# EAGLE board mehhhh (EAGLE 6.1)
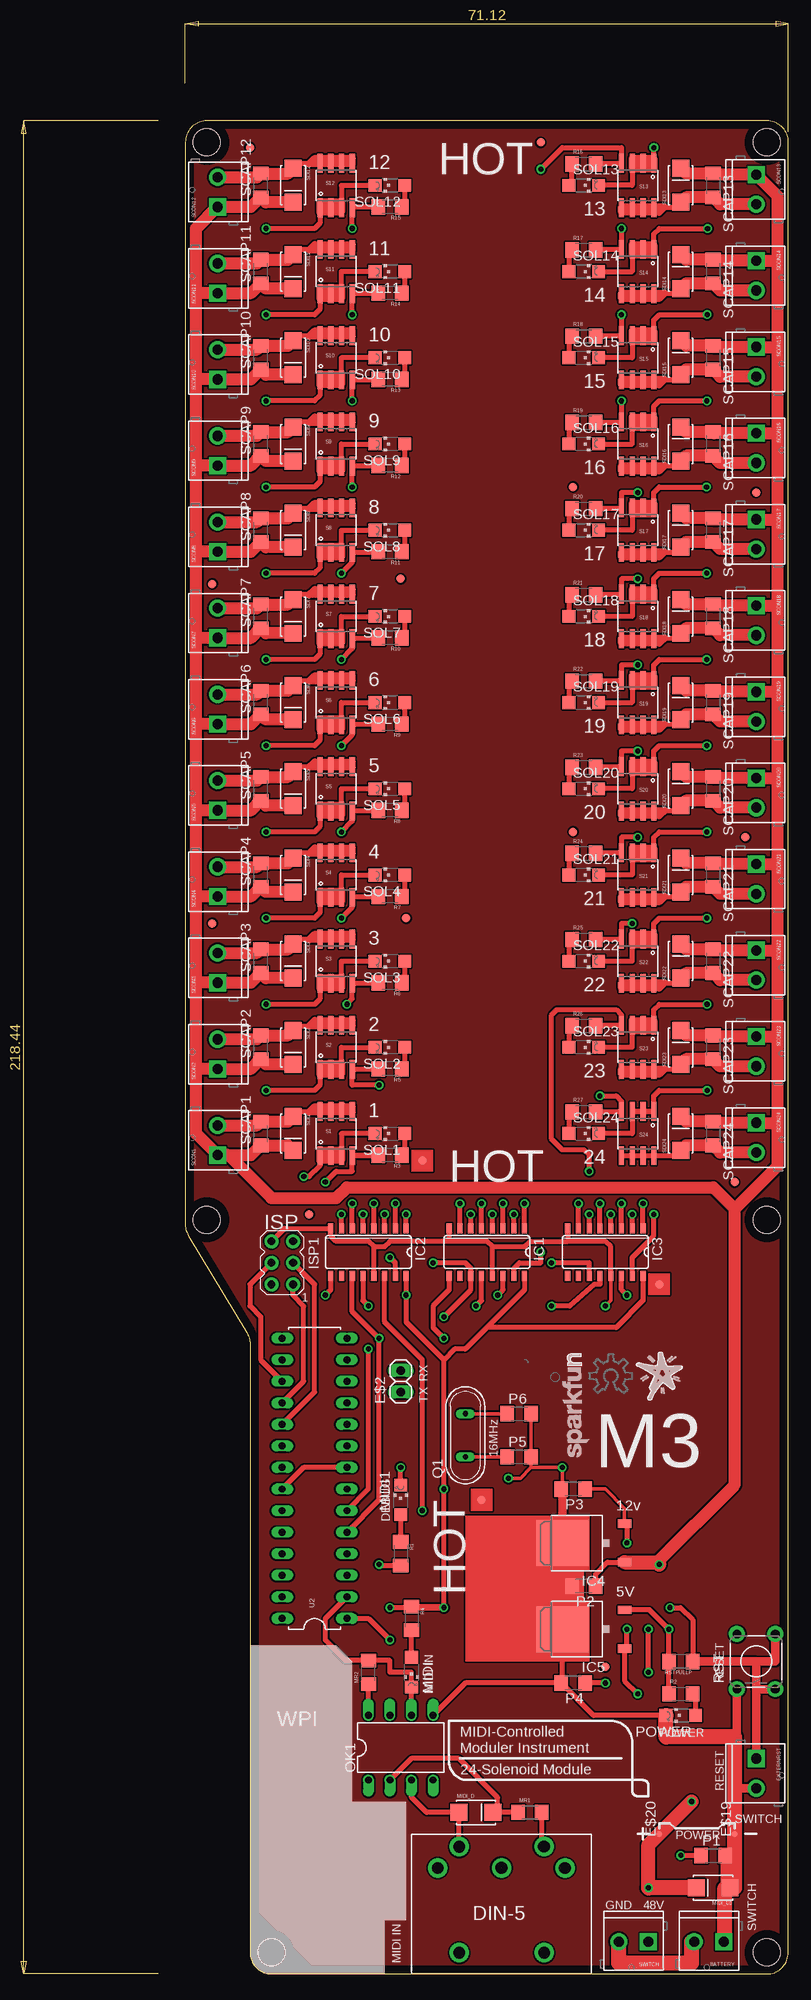
[diagram p0: board, top side]
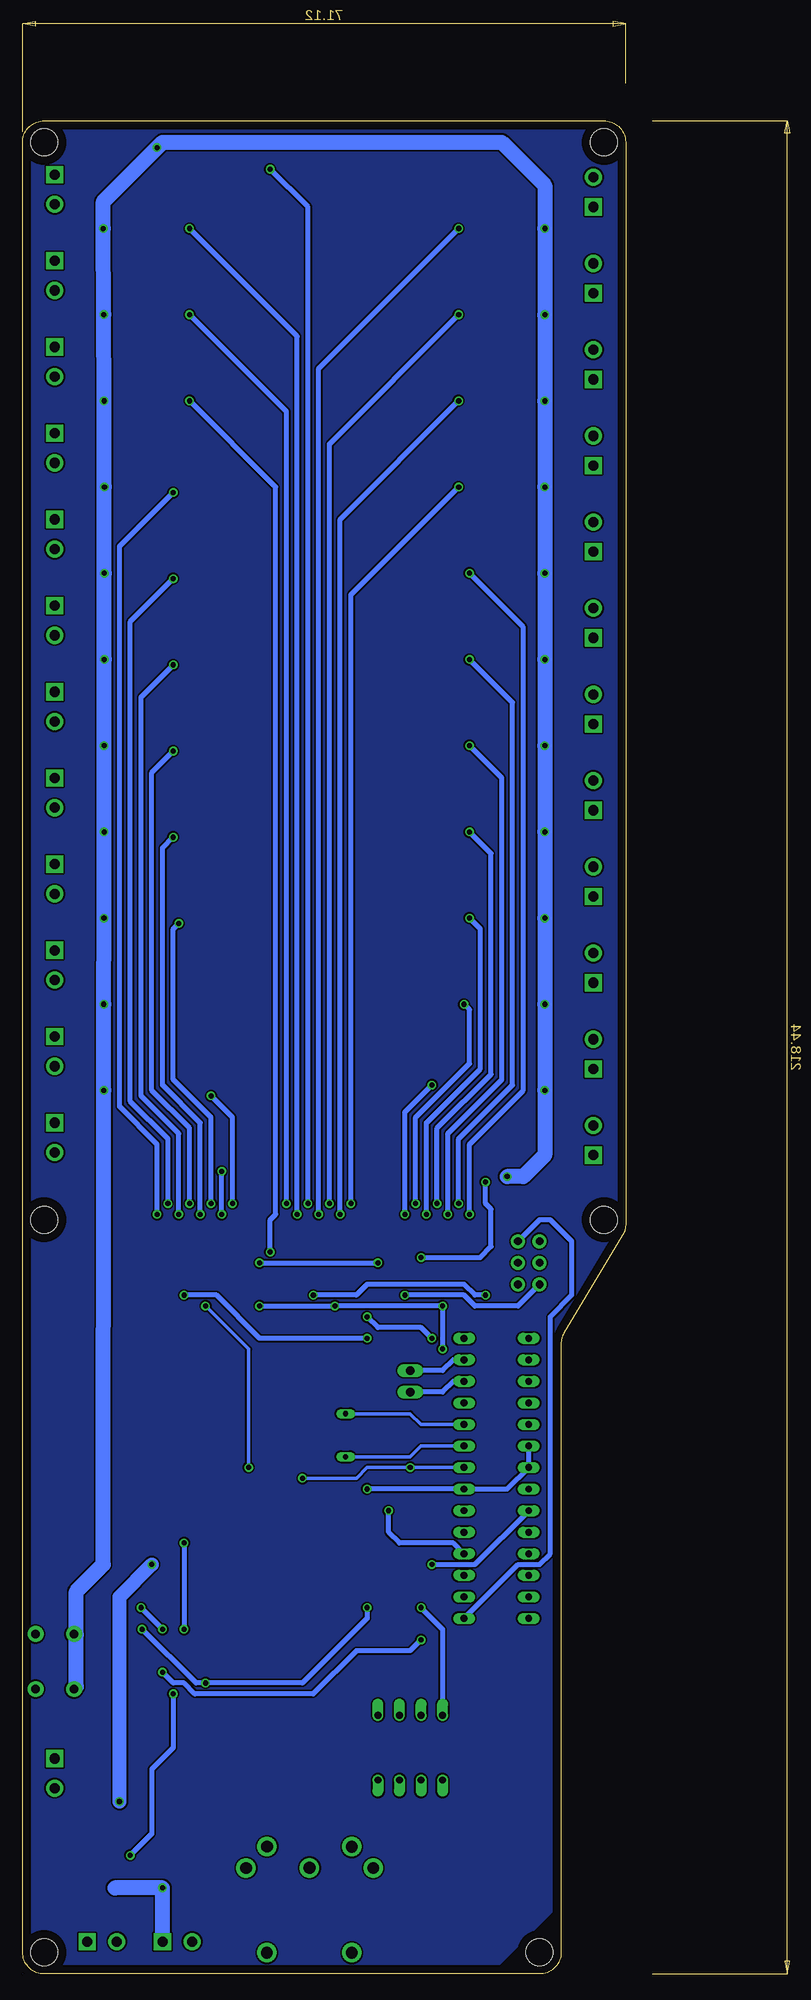
[diagram p1: board, bottom side, seen from below]

Size 71.12 x 218.43 mm. Coordinates in mm from the lower left corner, seen from the top.
Outline: 0.36,87.03 7.26,75.53 arc-31 7.62,74.23 7.62,2.54 arc90 10.16,0 68.56,0 arc90 71.1,2.54 71.12,93.98 71.12,215.89 arc90 68.58,218.43 2.54,218.43 arc90 0,215.89 0,88.33 arc31 0.36,87.03
Copper layers (1*16): Top 0.035mm / dielectric 1.5mm / Bottom 0.035mm
Design rules: minimum track width 10mil, minimum drill 24mil, track to track 8mil, track to pad 8mil, pad to pad 8mil, via to via 8mil, smd to smd 8mil, copper to edge 40mil, drill to drill 8mil, minimum pad ring 10mil, minimum via ring 8mil, stop-mask expansion 4mil, vias tented up to drill 0mil, thermal gap 10mil
Holes 3.2 mm at 2.54,88.9 68.58,88.9 10.16,2.54 68.58,2.54 2.54,215.9 68.58,215.9

## Footprints (pad centres in the part's own frame; a part is rotated, then mirrored left to right if it is on the bottom)
SCREWTERMINAL-3.5MM-2 = drill 1.2 pad 2.032 square: 1 0,0 | drill 1.2 pad 2.032: 2 3.5,0
FIDUCIAL-1X2 = smd 1 x 1: 1 0,0
1X02 = drill 1.016 long: 1 -1.27,0; 2 1.27,0
TP07R = smd 0.7 x 0.7: TP 0,0
SO16 = smd 0.6 x 1.2: 1 -4.445,-2.8; 2 -3.175,-2.8; 3 -1.905,-2.8; 4 -0.635,-2.8; 5 0.635,-2.8; 6 1.905,-2.8; 7 3.175,-2.8; 8 4.445,-2.8; 9 4.445,2.8; 10 3.175,2.8; 11 1.905,2.8; 12 0.635,2.8; 13 -0.635,2.8; 14 -1.905,2.8; 15 -3.175,2.8; 16 -4.445,2.8
TO252 = smd 1 x 1.6: 1 -2.28,-4.8; 2 2.28,-4.8 | smd 5.4 x 6.2: 3 0,2.5
AVRISP = drill 0.9 pad 1.626: 1 -1.27,2.54; 2 1.27,2.54; 3 -1.27,0; 4 1.27,0; 5 -1.27,-2.54; 6 1.27,-2.54
CHIPLED_1206 = smd 1.5 x 1.5: A 0,-1.75; C 0,1.75
SMA-DIODE_ALT = smd 2 x 2: A -2,0; C 2,0
1206 = smd 1.6 x 1.8: 1 -1.4,0; 2 1.4,0
DIL08 = drill 0.813 offset: 1 -3.81,-3.81; 2 -1.27,-3.81; 3 1.27,-3.81; 4 3.81,-3.81; 5 3.81,3.81; 6 1.27,3.81; 7 -1.27,3.81; 8 -3.81,3.81
C1206 = smd 1.6 x 1.8: 1 -1.4,0; 2 1.4,0
QS = drill 0.61 long: 1 -2.54,0; 2 2.54,0
TACTILE-PTH = drill 1.016 pad 1.88: 1 -3.251,2.261; 2 3.251,2.261; 3 -3.251,-2.261; 4 3.251,-2.261
SO08 = smd 0.61 x 2.21: 1 -1.905,-2.616; 2 -0.635,-2.616; 3 0.635,-2.616; 4 1.905,-2.616; 5 1.905,2.616; 6 0.635,2.616; 7 -0.635,2.616; 8 -1.905,2.616
DIL28-3 = drill 0.813 long: 1 -16.51,-3.81; 2 -13.97,-3.81; 3 -11.43,-3.81; 4 -8.89,-3.81; 5 -6.35,-3.81; 6 -3.81,-3.81; 7 -1.27,-3.81; 8 1.27,-3.81; 9 3.81,-3.81; 10 6.35,-3.81; 11 8.89,-3.81; 12 11.43,-3.81; 13 13.97,-3.81; 14 16.51,-3.81; 15 16.51,3.81; 16 13.97,3.81; 17 11.43,3.81; 18 8.89,3.81; 19 6.35,3.81; 20 3.81,3.81; 21 1.27,3.81; 22 -1.27,3.81; 23 -3.81,3.81; 24 -6.35,3.81; 25 -8.89,3.81; 26 -11.43,3.81; 27 -13.97,3.81; 28 -16.51,3.81
DIN_5_FEMALE_SUPPORT = drill 1.4 pad 2.286: 1 0.46,3.61; 2 -7.07,3.6; 3 7.94,3.6; 4 -4.53,6.12; 5 5.47,6.13; 6 -4.53,-6.382; 7 5.478,-6.382

## Placement (x,y rotation side)
BATTERY  [SCREWTERMINAL-3.5MM-2]  63.5,3.81 180 top
E$1  [FIDUCIAL-1X2]  14.61,89.53 0 top
E$2  [1X02]  25.4,69.85 90 top
E$3  [FIDUCIAL-1X2]  55.88,81.28 0 top
E$4  [FIDUCIAL-1X2]  7.62,215.26 0 top
E$5  [FIDUCIAL-1X2]  25.4,164.47 0 top
E$6  [FIDUCIAL-1X2]  3.17,163.83 0 top
E$7  [FIDUCIAL-1X2]  26.04,124.46 0 top
E$8  [FIDUCIAL-1X2]  3.17,123.83 0 top
E$9  [FIDUCIAL-1X2]  27.94,95.89 0 top
E$10  [FIDUCIAL-1X2]  41.91,215.9 0 top
E$11  [FIDUCIAL-1X2]  67.31,174.62 0 top
E$12  [FIDUCIAL-1X2]  45.72,175.26 0 top
E$13  [FIDUCIAL-1X2]  66.04,133.99 0 top
E$14  [FIDUCIAL-1X2]  45.72,134.62 0 top
E$15  [FIDUCIAL-1X2]  64.77,93.34 0 top
E$16  [FIDUCIAL-1X2]  34.92,55.88 0 top
E$17  [FIDUCIAL-1X2]  49.53,36.2 0 top
E$18  [SFE-NEW-WEB]  47.62,60.96 90 top
E$19  [TP07R]  64.77,16.51 90 top
E$20  [TP07R]  55.88,16.51 90 top
E$21  [OSHWLOGO_TOL_0.2]  50.16,70.48 0 top
E$22  [STARBOARD_LOGO]  55.88,70.48 0 top
EXTERNRST  [SCREWTERMINAL-3.5MM-2]  67.31,25.4 270 top
IC1  74LS595D  [SO16]  35.56,85.09 180 top
IC2  74LS595D  [SO16]  21.59,85.09 180 top
IC3  74LS595D  [SO16]  49.53,85.09 180 top
IC4  7812DT  [TO252]  46.99,50.8 90 top
IC5  7805DT  [TO252]  46.99,40.64 90 top
ISP1  AVRISP-6  [AVRISP]  11.43,83.82 180 top
MIDI  [CHIPLED_1206]  26.67,35.56 180 top
MIDI1  [CHIPLED_1206]  25.4,55.88 0 top
MIDI_D  [SMA-DIODE_ALT]  34.29,19.05 0 top
MIDI_D1  [SMA-DIODE_ALT]  62.23,10.16 180 top
MR1  220  [1206]  40.64,19.05 0 top
MR2  220  [1206]  21.59,35.56 90 top
OK1  6N138  [DIL08]  25.4,26.67 0 top
P1  [C1206]  62.23,13.97 0 top
P2  [C1206]  46.99,45.72 180 top
P3  [C1206]  45.72,57.15 180 top
P4  [C1206]  45.72,34.29 180 top
P5  [C1206]  39.37,60.96 0 top
P6  [C1206]  39.37,66.04 0 top
POWER  [CHIPLED_1206]  58.42,30.48 90 top
Q1  [QS]  33.02,63.5 90 top
R1  220  [1206]  25.4,49.53 270 top
R2  220  [1206]  58.42,33.02 0 top
R3  220  [1206]  24.13,96.52 180 top
R4  220  [1206]  26.67,41.91 270 top
R5  220  [1206]  24.13,106.68 180 top
R6  220  [1206]  24.13,116.84 180 top
R7  220  [1206]  24.13,127 180 top
R8  220  [1206]  24.13,137.16 180 top
R9  220  [1206]  24.13,147.32 180 top
R10  220  [1206]  24.13,157.48 180 top
R11  220  [1206]  24.13,167.64 180 top
R12  220  [1206]  24.13,177.8 180 top
R13  220  [1206]  24.13,187.96 180 top
R14  220  [1206]  24.13,198.12 180 top
R15  220  [1206]  24.13,208.28 180 top
R16  220  [1206]  46.99,213.36 0 top
R17  220  [1206]  46.99,203.2 0 top
R18  220  [1206]  46.99,193.04 0 top
R19  220  [1206]  46.99,182.88 0 top
R20  220  [1206]  46.99,172.72 0 top
R21  220  [1206]  46.99,162.56 0 top
R22  220  [1206]  46.99,152.4 0 top
R23  220  [1206]  46.99,142.24 0 top
R24  220  [1206]  46.99,132.08 0 top
R25  220  [1206]  46.99,121.92 0 top
R26  220  [1206]  46.99,111.76 0 top
R27  220  [1206]  46.99,101.6 0 top
RST  [TACTILE-PTH]  67.31,36.83 90 top
RSTPULLP  10K  [1206]  58.42,36.83 180 top
S1  MOSFET-NCHANNEL-SOIC8  [SO08]  17.78,99.06 0 top
S2  MOSFET-NCHANNEL-SOIC8  [SO08]  17.78,109.22 0 top
S3  MOSFET-NCHANNEL-SOIC8  [SO08]  17.78,119.38 0 top
S4  MOSFET-NCHANNEL-SOIC8  [SO08]  17.78,129.54 0 top
S5  MOSFET-NCHANNEL-SOIC8  [SO08]  17.78,139.7 0 top
S6  MOSFET-NCHANNEL-SOIC8  [SO08]  17.78,149.86 0 top
S7  MOSFET-NCHANNEL-SOIC8  [SO08]  17.78,160.02 0 top
S8  MOSFET-NCHANNEL-SOIC8  [SO08]  17.78,170.18 0 top
S9  MOSFET-NCHANNEL-SOIC8  [SO08]  17.78,180.34 0 top
S10  MOSFET-NCHANNEL-SOIC8  [SO08]  17.78,190.5 0 top
S11  MOSFET-NCHANNEL-SOIC8  [SO08]  17.78,200.66 0 top
S12  MOSFET-NCHANNEL-SOIC8  [SO08]  17.78,210.82 0 top
S13  MOSFET-NCHANNEL-SOIC8  [SO08]  53.34,210.82 180 top
S14  MOSFET-NCHANNEL-SOIC8  [SO08]  53.34,200.66 180 top
S15  MOSFET-NCHANNEL-SOIC8  [SO08]  53.34,190.5 180 top
S16  MOSFET-NCHANNEL-SOIC8  [SO08]  53.34,180.34 180 top
S17  MOSFET-NCHANNEL-SOIC8  [SO08]  53.34,170.18 180 top
S18  MOSFET-NCHANNEL-SOIC8  [SO08]  53.34,160.02 180 top
S19  MOSFET-NCHANNEL-SOIC8  [SO08]  53.34,149.86 180 top
S20  MOSFET-NCHANNEL-SOIC8  [SO08]  53.34,139.7 180 top
S21  MOSFET-NCHANNEL-SOIC8  [SO08]  53.34,129.54 180 top
S22  MOSFET-NCHANNEL-SOIC8  [SO08]  53.34,119.38 180 top
S23  MOSFET-NCHANNEL-SOIC8  [SO08]  53.34,109.22 180 top
S24  MOSFET-NCHANNEL-SOIC8  [SO08]  53.34,99.06 180 top
SCAP1  [C1206]  8.89,99.06 90 top
SCAP2  [C1206]  8.89,109.22 90 top
SCAP3  [C1206]  8.89,119.38 90 top
SCAP4  [C1206]  8.89,129.54 90 top
SCAP5  [C1206]  8.89,139.7 90 top
SCAP6  [C1206]  8.89,149.86 90 top
SCAP7  [C1206]  8.89,160.02 90 top
SCAP8  [C1206]  8.89,170.18 90 top
SCAP9  [C1206]  8.89,180.34 90 top
SCAP10  [C1206]  8.89,190.5 90 top
SCAP11  [C1206]  8.89,200.66 90 top
SCAP12  [C1206]  8.89,210.82 90 top
SCAP13  [C1206]  62.23,210.82 270 top
SCAP14  [C1206]  62.23,200.66 270 top
SCAP15  [C1206]  62.23,190.5 270 top
SCAP16  [C1206]  62.23,180.34 270 top
SCAP17  [C1206]  62.23,170.18 270 top
SCAP18  [C1206]  62.23,160.02 270 top
SCAP19  [C1206]  62.23,149.86 270 top
SCAP20  [C1206]  62.23,139.7 270 top
SCAP21  [C1206]  62.23,129.54 270 top
SCAP22  [C1206]  62.23,119.38 270 top
SCAP23  [C1206]  62.23,109.22 270 top
SCAP24  [C1206]  62.23,99.06 270 top
SCON1  [SCREWTERMINAL-3.5MM-2]  3.81,96.52 90 top
SCON2  [SCREWTERMINAL-3.5MM-2]  3.81,106.68 90 top
SCON3  [SCREWTERMINAL-3.5MM-2]  3.81,116.84 90 top
SCON4  [SCREWTERMINAL-3.5MM-2]  3.81,127 90 top
SCON5  [SCREWTERMINAL-3.5MM-2]  3.81,137.16 90 top
SCON6  [SCREWTERMINAL-3.5MM-2]  3.81,147.32 90 top
SCON7  [SCREWTERMINAL-3.5MM-2]  3.81,157.48 90 top
SCON8  [SCREWTERMINAL-3.5MM-2]  3.81,167.64 90 top
SCON9  [SCREWTERMINAL-3.5MM-2]  3.81,177.8 90 top
SCON10  [SCREWTERMINAL-3.5MM-2]  3.81,187.96 90 top
SCON11  [SCREWTERMINAL-3.5MM-2]  3.81,198.12 90 top
SCON12  [SCREWTERMINAL-3.5MM-2]  3.81,208.28 90 top
SCON13  [SCREWTERMINAL-3.5MM-2]  67.31,212.09 270 top
SCON14  [SCREWTERMINAL-3.5MM-2]  67.31,201.93 270 top
SCON15  [SCREWTERMINAL-3.5MM-2]  67.31,191.77 270 top
SCON16  [SCREWTERMINAL-3.5MM-2]  67.31,181.61 270 top
SCON17  [SCREWTERMINAL-3.5MM-2]  67.31,171.45 270 top
SCON18  [SCREWTERMINAL-3.5MM-2]  67.31,161.29 270 top
SCON19  [SCREWTERMINAL-3.5MM-2]  67.31,151.13 270 top
SCON20  [SCREWTERMINAL-3.5MM-2]  67.31,140.97 270 top
SCON21  [SCREWTERMINAL-3.5MM-2]  67.31,130.81 270 top
SCON22  [SCREWTERMINAL-3.5MM-2]  67.31,120.65 270 top
SCON23  [SCREWTERMINAL-3.5MM-2]  67.31,110.49 270 top
SCON24  [SCREWTERMINAL-3.5MM-2]  67.31,100.33 270 top
SDI1  [SMA-DIODE_ALT]  12.7,99.06 270 top
SDI2  [SMA-DIODE_ALT]  12.7,109.22 270 top
SDI3  [SMA-DIODE_ALT]  12.7,119.38 270 top
SDI4  [SMA-DIODE_ALT]  12.7,129.54 270 top
SDI5  [SMA-DIODE_ALT]  12.7,139.7 270 top
SDI6  [SMA-DIODE_ALT]  12.7,149.86 270 top
SDI7  [SMA-DIODE_ALT]  12.7,160.02 270 top
SDI8  [SMA-DIODE_ALT]  12.7,170.18 270 top
SDI9  [SMA-DIODE_ALT]  12.7,180.34 270 top
SDI10  [SMA-DIODE_ALT]  12.7,190.5 270 top
SDI11  [SMA-DIODE_ALT]  12.7,200.66 270 top
SDI12  [SMA-DIODE_ALT]  12.7,210.82 270 top
SDI13  [SMA-DIODE_ALT]  58.42,210.82 90 top
SDI14  [SMA-DIODE_ALT]  58.42,200.66 90 top
SDI15  [SMA-DIODE_ALT]  58.42,190.5 90 top
SDI16  [SMA-DIODE_ALT]  58.42,180.34 90 top
SDI17  [SMA-DIODE_ALT]  58.42,170.18 90 top
SDI18  [SMA-DIODE_ALT]  58.42,160.02 90 top
SDI19  [SMA-DIODE_ALT]  58.42,149.86 90 top
SDI20  [SMA-DIODE_ALT]  58.42,139.7 90 top
SDI21  [SMA-DIODE_ALT]  58.42,129.54 90 top
SDI22  [SMA-DIODE_ALT]  58.42,119.38 90 top
SDI23  [SMA-DIODE_ALT]  58.42,109.22 90 top
SDI24  [SMA-DIODE_ALT]  58.42,99.06 90 top
SOL1  [CHIPLED_1206]  24.13,99.06 90 top
SOL2  [CHIPLED_1206]  24.13,109.22 90 top
SOL3  [CHIPLED_1206]  24.13,119.38 90 top
SOL4  [CHIPLED_1206]  24.13,129.54 90 top
SOL5  [CHIPLED_1206]  24.13,139.7 90 top
SOL6  [CHIPLED_1206]  24.13,149.86 90 top
SOL7  [CHIPLED_1206]  24.13,160.02 90 top
SOL8  [CHIPLED_1206]  24.13,170.18 90 top
SOL9  [CHIPLED_1206]  24.13,180.34 90 top
SOL10  [CHIPLED_1206]  24.13,190.5 90 top
SOL11  [CHIPLED_1206]  24.13,200.66 90 top
SOL12  [CHIPLED_1206]  24.13,210.82 90 top
SOL13  [CHIPLED_1206]  46.99,210.82 270 top
SOL14  [CHIPLED_1206]  46.99,200.66 270 top
SOL15  [CHIPLED_1206]  46.99,190.5 270 top
SOL16  [CHIPLED_1206]  46.99,180.34 270 top
SOL17  [CHIPLED_1206]  46.99,170.18 270 top
SOL18  [CHIPLED_1206]  46.99,160.02 270 top
SOL19  [CHIPLED_1206]  46.99,149.86 270 top
SOL20  [CHIPLED_1206]  46.99,139.7 270 top
SOL21  [CHIPLED_1206]  46.99,129.54 270 top
SOL22  [CHIPLED_1206]  46.99,119.38 270 top
SOL23  [CHIPLED_1206]  46.99,109.22 270 top
SOL24  [CHIPLED_1206]  46.99,99.06 270 top
SWITCH  [SCREWTERMINAL-3.5MM-2]  54.61,3.81 180 top
U2  ATMEGA328P_PDIP  [DIL28-3]  15.24,58.42 90 top
U$1  [LOGO]  36.2,69.85 0 top
U$3  MIDI_CONN_FEMALE_SUPPORT  [DIN_5_FEMALE_SUPPORT]  36.83,8.89 0 top

## Library data of the parts
BATTERY E$22 EXTERNRST IC1-IC3 MIDI_D MIDI_D1 MR1 MR2 R1-R27 RSTPULLP SCON1-SCON24 SDI1-SDI24 SWITCH = Due
E$1 E$3-E$18 = SparkFun-Aesthetics
E$2 = pinhead
E$19 E$20 = testpad
E$21 ISP1 MIDI MIDI1 P1-P6 POWER SCAP1-SCAP24 SOL1-SOL24 = adafruit
IC4 IC5 = linear
OK1 = optocoupler
Q1 = special
RST S1-S24 = SparkFun
U2 = SparkFun-DigitalIC
U$1 = atmel
U$3 = SparkFun-Connectors

## Nets
5V: IC1.16 IC2.16 IC3.16 IC5.2 ISP1.2 MR2.1 OK1.8 P4.1 R2.1 R4.1 RSTPULLP.2 U2.7 U2.20 U2.21
+12V: IC4.2 IC5.1 P1.1 P3.1
GND: BATTERY.1 EXTERNRST.2 IC1.8 IC1.13 IC2.8 IC2.13 IC3.8 IC3.13 IC4.3 IC5.3 ISP1.6 MIDI1.C MIDI_D1.A OK1.5 P1.2 P2.2 P3.2 P4.2 P5.2 P6.2 POWER.C RST.1 RST.2 S1.1 S1.2 S1.3 S2.1 S2.2 S2.3 S3.1 S3.2 S3.3 S4.1 S4.2 S4.3 S5.1 S5.2 S5.3 S6.1 S6.2 S6.3 S7.1 S7.2 S7.3 S8.1 S8.2 S8.3 S9.1 S9.2 S9.3 S10.1 S10.2 S10.3 S11.1 S11.2 S11.3 S12.1 S12.2 S12.3 S13.1 S13.2 S13.3 S14.1 S14.2 S14.3 S15.1 S15.2 S15.3 S16.1 S16.2 S16.3 S17.1 S17.2 S17.3 S18.1 S18.2 S18.3 S19.1 S19.2 S19.3 S20.1 S20.2 S20.3 S21.1 S21.2 S21.3 S22.1 S22.2 S22.3 S23.1 S23.2 S23.3 S24.1 S24.2 S24.3 SOL1.C SOL2.C SOL3.C SOL4.C SOL5.C SOL6.C SOL7.C SOL8.C SOL9.C SOL10.C SOL11.C SOL12.C SOL13.C SOL14.C SOL15.C SOL16.C SOL17.C SOL18.C SOL19.C SOL20.C SOL21.C SOL22.C SOL23.C SOL24.C U2.8 U2.22
LEDOUT: R1.2 U2.23
MIDIRX: MIDI.C MR2.2 OK1.6 U2.2
MISO: ISP1.1 U2.18
MOSI: ISP1.4 U2.17
N$2: MR1.2 U$3.5
N$3: MIDI_D.C MR1.1 OK1.2
N$4: MIDI_D.A OK1.3 U$3.4
N$6: MIDI1.A R1.1
N$7: POWER.A R2.2
N$8: MIDI.A R4.2
N$9: IC1.14 IC2.9
N$12: P5.1 Q1.1 U2.9
N$13: IC1.9 IC3.14
N$14: R3.1 SOL1.A
N$15: S1.5 S1.6 S1.7 S1.8 SCAP1.2 SCON1.2 SDI1.A
N$16: S2.5 S2.6 S2.7 S2.8 SCAP2.2 SCON2.2 SDI2.A
N$17: P6.1 Q1.2 U2.10
N$19: R5.1 SOL2.A
N$20: S3.5 S3.6 S3.7 S3.8 SCAP3.2 SCON3.2 SDI3.A
N$22: R6.1 SOL3.A
N$23: S4.5 S4.6 S4.7 S4.8 SCAP4.2 SCON4.2 SDI4.A
N$25: R7.1 SOL4.A
N$26: S5.5 S5.6 S5.7 S5.8 SCAP5.2 SCON5.2 SDI5.A
N$28: R8.1 SOL5.A
N$29: S6.5 S6.6 S6.7 S6.8 SCAP6.2 SCON6.2 SDI6.A
N$31: R9.1 SOL6.A
N$32: S7.5 S7.6 S7.7 S7.8 SCAP7.2 SCON7.2 SDI7.A
N$34: R10.1 SOL7.A
N$35: S8.5 S8.6 S8.7 S8.8 SCAP8.2 SCON8.2 SDI8.A
N$37: R11.1 SOL8.A
N$38: S9.5 S9.6 S9.7 S9.8 SCAP9.2 SCON9.2 SDI9.A
N$40: R12.1 SOL9.A
N$41: S10.5 S10.6 S10.7 S10.8 SCAP10.2 SCON10.2 SDI10.A
N$43: R13.1 SOL10.A
N$44: S11.5 S11.6 S11.7 S11.8 SCAP11.2 SCON11.2 SDI11.A
N$46: R14.1 SOL11.A
N$47: S12.5 S12.6 S12.7 S12.8 SCAP12.2 SCON12.2 SDI12.A
N$49: R15.1 SOL12.A
N$50: S13.5 S13.6 S13.7 S13.8 SCAP13.2 SCON13.2 SDI13.A
N$52: R16.1 SOL13.A
N$53: S14.5 S14.6 S14.7 S14.8 SCAP14.2 SCON14.2 SDI14.A
N$55: R17.1 SOL14.A
N$56: S15.5 S15.6 S15.7 S15.8 SCAP15.2 SCON15.2 SDI15.A
N$58: R18.1 SOL15.A
N$59: S16.5 S16.6 S16.7 S16.8 SCAP16.2 SCON16.2 SDI16.A
N$61: R19.1 SOL16.A
N$62: S17.5 S17.6 S17.7 S17.8 SCAP17.2 SCON17.2 SDI17.A
N$64: R20.1 SOL17.A
N$65: S18.5 S18.6 S18.7 S18.8 SCAP18.2 SCON18.2 SDI18.A
N$67: R21.1 SOL18.A
N$68: S19.5 S19.6 S19.7 S19.8 SCAP19.2 SCON19.2 SDI19.A
N$70: R22.1 SOL19.A
N$71: S20.5 S20.6 S20.7 S20.8 SCAP20.2 SCON20.2 SDI20.A
N$73: R23.1 SOL20.A
N$74: S21.5 S21.6 S21.7 S21.8 SCAP21.2 SCON21.2 SDI21.A
N$76: R24.1 SOL21.A
N$77: S22.5 S22.6 S22.7 S22.8 SCAP22.2 SCON22.2 SDI22.A
N$79: R25.1 SOL22.A
N$80: S23.5 S23.6 S23.7 S23.8 SCAP23.2 SCON23.2 SDI23.A
N$82: R26.1 SOL23.A
N$83: S24.5 S24.6 S24.7 S24.8 SCAP24.2 SCON24.2 SDI24.A
N$85: R27.1 SOL24.A
RCK: IC1.12 IC2.12 IC3.12 U2.6
RES: EXTERNRST.1 ISP1.5 RST.3 RST.4 RSTPULLP.1 U2.1
S$1: E$2.2 U2.13
S$2: E$2.1 U2.12
SCK: IC1.11 IC2.11 IC3.11 U2.5
SER: IC2.14 U2.4
SHIFTOUT0: IC2.15 R3.2 S1.4
SHIFTOUT1: IC2.1 R5.2 S2.4
SHIFTOUT2: IC2.2 R6.2 S3.4
SHIFTOUT3: IC2.3 R7.2 S4.4
SHIFTOUT4: IC2.4 R8.2 S5.4
SHIFTOUT5: IC2.5 R9.2 S6.4
SHIFTOUT6: IC2.6 R10.2 S7.4
SHIFTOUT7: IC2.7 R11.2 S8.4
SHIFTOUT8: IC1.15 R19.2 S16.4
SHIFTOUT9: IC1.1 R18.2 S15.4
SHIFTOUT10: IC1.2 R17.2 S14.4
SHIFTOUT11: IC1.3 R16.2 S13.4
SHIFTOUT12: IC1.4 R15.2 S12.4
SHIFTOUT13: IC1.5 R14.2 S11.4
SHIFTOUT14: IC1.6 R13.2 S10.4
SHIFTOUT15: IC1.7 R12.2 S9.4
SHIFTOUT16: IC3.15 R20.2 S17.4
SHIFTOUT17: IC3.1 R21.2 S18.4
SHIFTOUT18: IC3.2 R22.2 S19.4
SHIFTOUT19: IC3.3 R23.2 S20.4
SHIFTOUT20: IC3.4 R24.2 S21.4
SHIFTOUT21: IC3.5 R25.2 S22.4
SHIFTOUT22: IC3.6 R26.2 S23.4
SHIFTOUT23: IC3.7 R27.2 S24.4
SPISCK: ISP1.3 U2.19
VCC: BATTERY.2 SWITCH.2
VDD: IC4.1 MIDI_D1.C P2.1 SCAP1.1 SCAP2.1 SCAP3.1 SCAP4.1 SCAP5.1 SCAP6.1 SCAP7.1 SCAP8.1 SCAP9.1 SCAP10.1 SCAP11.1 SCAP12.1 SCAP13.1 SCAP14.1 SCAP15.1 SCAP16.1 SCAP17.1 SCAP18.1 SCAP19.1 SCAP20.1 SCAP21.1 SCAP22.1 SCAP23.1 SCAP24.1 SCON1.1 SCON2.1 SCON3.1 SCON4.1 SCON5.1 SCON6.1 SCON7.1 SCON8.1 SCON9.1 SCON10.1 SCON11.1 SCON12.1 SCON13.1 SCON14.1 SCON15.1 SCON16.1 SCON17.1 SCON18.1 SCON19.1 SCON20.1 SCON21.1 SCON22.1 SCON23.1 SCON24.1 SDI1.C SDI2.C SDI3.C SDI4.C SDI5.C SDI6.C SDI7.C SDI8.C SDI9.C SDI10.C SDI11.C SDI12.C SDI13.C SDI14.C SDI15.C SDI16.C SDI17.C SDI18.C SDI19.C SDI20.C SDI21.C SDI22.C SDI23.C SDI24.C SWITCH.1

## Tracks (layer width: path | path; a pad name or v marks a point on that pad's centre or on a via)
5V  (via drill 0.6)
  Top 0.61: IC5.2 54.74,42.92 v57.02,40.64 RSTPULLP.2 R2.1 | OK1.8 MR2.1 | 26.67,43.18 R4.1 30.35,43.31 v30.48,43.18 | 26.67,43.18 v24.13,43.18 | 26.67,43.18 v30.48,43.18 | v49.53,34.29 P4.1 | v30.48,43.18 v30.48,57.15 30.48,72.39 | IC2.16 v26.04,80.01 26.04,76.83 30.48,72.39 | IC1.16 40.01,80.64 35.56,76.2 | 35.56,76.2 33.02,73.66 31.75,73.66 30.48,72.39 | IC3.16 53.98,79.38 50.8,76.2 35.56,76.2
  Bottom 0.61: v24.13,43.18 21.59,40.64 OK1.8 | v30.48,43.18 30.48,41.91 38.1,34.29 v49.53,34.29 50.67,34.29 v57.02,40.64 | v30.48,57.15 U2.7 13.97,57.15 U2.21 U2.20 | ISP1.2 12.7,78.74 17.78,78.74 19.05,80.01 v26.04,80.01
+12V  (via drill 0.6)
  Top 0.406: IC4.2 51.79,54.89 49.53,57.15 P3.1
  Top 0.61: v53.34,33.02 51.79,34.57 IC5.1 52.07,38.64 v52.07,40.64 | v58.42,13.97 P1.1 | IC4.2 52.07,52.8 v52.07,50.8
  Bottom 0.61: v53.34,33.02 53.34,26.67 55.88,24.13 55.88,16.51 v58.42,13.97 | v52.07,50.8 v52.07,40.64
GND  (via drill 0.6)
  Top 0.406: IC5.3 44.45,40.64 44.45,45.72 | 44.45,45.72 44.45,50.8 | P2.2 44.45,45.72 | 44.49,57.15 44.49,59.65 v44.45,59.69 40.77,59.69 | v49.53,78.74 50.16,79.38 IC3.13 | 40.77,59.69 P5.2 P6.2 | v38.1,58.42 39.5,58.42 40.77,59.69
  Top 0.61: P4.2 44.49,34.29 IC5.3 | IC2.13 22.23,85.72 | 22.23,85.72 21.59,86.36 17.78,86.36 17.14,87 IC2.8 11.69,87.89 ISP1.6 | IC1.8 31.11,86.36 | IC1.13 36.2,85.72 | 36.2,85.72 35.56,86.36 31.11,86.36 | 45.09,86.36 40.64,86.36 40.01,85.72 36.2,85.72 | 45.09,87 IC3.8 45.09,86.36 | IC3.13 50.16,85.72 49.53,86.36 45.09,86.36 | P4.2 33.02,34.29 OK1.5 | POWER.C 48.13,30.48 P4.2 | U2.8 13.97,59.69 U2.22 | MIDI1.C v25.4,59.69 | 31.11,86.36 24.13,86.36 23.5,85.72 22.23,85.72 | SOL13.C 52.7,210.82 52.7,212.72 S13.3 S13.2 S13.1 55.24,214 v55.24,215.26 | S12.1 S12.2 S12.3 18.41,208.28 | SOL12.C 18.41,210.82 18.41,208.91 18.41,208.28 | SOL1.C 18.41,99.06 18.41,97.16 S1.3 S1.2 S1.1 15.88,95.89 15.88,95.25 14.61,93.98 v13.97,93.98 | S2.1 S2.2 S2.3 | S2.3 18.41,107.31 18.41,109.22 SOL2.C | S3.1 S3.2 S3.3 | S3.3 18.41,117.47 18.41,119.38 SOL3.C | S4.1 S4.2 S4.3 | S4.3 18.41,127.64 18.41,129.54 SOL4.C | S5.1 S5.2 S5.3 | S5.3 18.41,137.79 18.41,139.7 SOL5.C | S6.1 S6.2 S6.3 | S6.3 18.41,147.96 18.41,149.86 SOL6.C | S7.1 S7.2 S7.3 | S7.3 18.41,158.12 18.41,160.02 SOL7.C | S8.1 S8.2 S8.3 | S8.3 18.41,168.28 18.41,170.18 SOL8.C | S9.1 S9.2 S9.3 | S9.3 18.41,178.44 18.41,180.34 SOL9.C | S10.1 S10.2 S10.3 | S10.3 18.41,188.59 18.41,190.5 SOL10.C | S11.1 S11.2 S11.3 | S11.3 18.41,198.75 18.41,200.66 SOL11.C | S14.1 S14.2 S14.3 | S14.3 52.7,202.56 52.7,200.66 SOL14.C | S15.3 S15.2 S15.1 | S15.3 52.7,192.41 52.7,190.5 SOL15.C | S16.3 S16.2 S16.1 | SOL16.C 52.7,180.34 52.7,182.25 S16.3 | S18.3 S18.2 S18.1 | S18.3 52.7,161.93 52.7,160.02 SOL18.C | S17.3 S17.2 S17.1 | S17.3 52.7,172.09 52.7,170.18 SOL17.C | S19.1 S19.2 S19.3 | S19.3 52.7,151.76 52.7,149.86 SOL19.C
  Top 0.61: S20.1 S20.2 S20.3 | S20.3 52.7,141.6 52.7,139.7 SOL20.C | S21.1 S21.2 S21.3 | S21.3 52.7,131.44 52.7,129.54 SOL21.C | S22.1 S22.2 S22.3 | SOL22.C 52.7,119.38 52.7,121.28 S22.3 | S23.1 S23.2 S23.3 52.7,111.76 | SOL23.C 52.7,109.22 52.7,111.12 52.7,111.76 | S24.1 S24.2 S24.3 | S24.3 52.7,99.06 SOL24.C | S2.3 18.34,106.68 15.88,106.68 15.88,106.05 15.88,104.78 15.24,104.14 v9.53,104.14 | S3.3 15.95,116.76 15.88,116.84 15.88,116.2 15.88,114.94 15.24,114.3 v9.53,114.3 | S4.3 15.95,126.92 15.88,127 15.88,126.36 15.88,125.09 15.24,124.46 v9.53,124.46 | S5.3 15.95,137.08 15.88,137.16 15.88,136.53 15.88,135.25 15.24,134.62 v9.53,134.62 | S6.3 15.95,147.24 15.88,147.32 15.88,146.69 15.88,145.41 15.24,144.78 v9.53,144.78 | S7.3 15.95,157.4 15.88,157.48 15.88,156.84 15.88,155.57 15.24,154.94 v9.53,154.94 | S8.3 15.95,167.56 15.88,167.64 15.88,167 15.88,165.74 15.24,165.1 v9.53,165.1 | S9.3 15.95,177.72 15.88,177.8 15.88,177.16 15.88,175.9 15.24,175.26 v9.53,175.26 | S10.3 15.95,187.88 15.88,187.96 15.88,187.32 15.88,186.06 15.24,185.42 v9.53,185.42 | S11.3 15.95,198.04 15.88,198.12 15.88,197.49 15.88,196.22 15.24,195.58 v9.53,195.58 | 18.41,208.28 15.88,208.28 15.88,207.65 15.88,206.38 15.24,205.74 v9.53,205.74 | S14.3 55.17,203.28 55.24,203.2 55.24,203.84 55.24,205.1 55.88,205.74 v61.58,205.74 | S15.3 55.17,193.12 55.24,193.04 55.24,193.68 55.24,194.94 55.88,195.58 v61.54,195.58 | S16.3 55.17,182.96 55.24,182.88 55.24,183.51 55.24,184.78 55.88,185.42 v61.5,185.42 | S17.3 55.17,172.8 55.24,172.72 55.24,173.35 55.24,174.62 55.88,175.26 v61.46,175.26 | S18.3 55.17,162.64 55.24,162.56 55.24,163.19 55.24,164.47 55.88,165.1 v61.47,165.1
  Top 0.61: 61.42,165.08 61.45,165.08 v61.47,165.1 | 61.59,165.1 v61.47,165.1 | v61.47,165.1 | S19.3 55.17,152.48 55.24,152.4 55.24,153.03 55.24,154.31 55.88,154.94 v61.48,154.94 | S20.3 55.17,142.32 55.24,142.24 55.24,142.88 55.24,144.15 55.88,144.78 v61.49,144.78 | S21.3 55.17,132.16 55.24,132.08 55.24,132.72 55.24,133.99 55.88,134.62 v61.5,134.62 | S22.3 55.17,122 55.24,121.92 55.24,122.56 55.24,123.83 55.88,124.46 v61.51,124.46 v61.52,124.46 | S24.3 55.17,101.68 55.24,101.6 55.24,103.5 55.88,104.14 v61.54,104.14 | 52.7,111.76 55.24,111.76 55.24,112.39 55.24,113.67 55.88,114.3 v61.52,114.3 v61.53,114.3
  Top 0.813: 52.7,112.39 55.24,112.39 55.24,111.12 52.7,111.12 52.7,112.39 | 52.7,122.56 55.24,122.56 55.24,121.28 52.7,121.28 52.7,122.56 | 52.7,132.72 55.24,132.72 55.24,131.44 52.7,131.44 52.7,132.72 | 52.7,142.88 55.24,142.88 55.24,141.6 52.7,141.6 52.7,142.88 | 52.7,153.03 55.24,153.03 55.24,151.76 52.7,151.76 52.7,153.03 | 52.7,163.19 55.24,163.19 55.24,161.93 52.7,161.93 52.7,163.19 | 52.7,173.35 55.24,173.35 55.24,172.09 52.7,172.09 52.7,173.35 | 52.7,183.51 55.24,183.51 55.24,182.25 52.7,182.25 52.7,183.51 | 52.7,193.68 55.24,193.68 55.24,192.41 52.7,192.41 52.7,193.68 | 52.7,203.84 55.24,203.84 55.24,202.56 52.7,202.56 52.7,203.84 | 52.7,214 55.24,214 55.24,212.72 52.7,212.72 52.7,214 | 15.88,208.91 18.41,208.91 18.41,207.65 15.88,207.65 15.88,208.91 | 15.88,198.75 18.41,198.75 18.41,197.49 15.88,197.49 15.88,198.75 | 15.88,188.59 18.41,188.59 18.41,187.32 15.88,187.32 15.88,188.59 | 15.88,178.44 18.41,178.44 18.41,177.16 15.88,177.16 15.88,178.44 | 15.88,168.28 18.41,168.28 18.41,167 15.88,167 15.88,168.28 | 15.88,158.12 18.41,158.12 18.41,156.84 15.88,156.84 15.88,158.12 | 15.88,147.96 18.41,147.96 18.41,146.69 15.88,146.69 15.88,147.96 | 15.88,137.79 18.41,137.79 18.41,136.53 15.88,136.53 15.88,137.79 | 15.88,127.64 18.41,127.64 18.41,126.36 15.88,126.36 15.88,127.64 | 15.88,117.47 18.41,117.47 18.41,116.2 15.88,116.2 15.88,117.47 | 15.88,107.31 18.41,107.31 18.41,106.05 15.88,106.05 15.88,107.31 | 15.88,97.16 18.41,97.16 18.41,95.89 15.88,95.89 15.88,97.16
  Top 1.016: P3.2 44.49,57.15 IC4.3 | EXTERNRST.2 65.05,21.9 | 65.05,21.9 RST.1 | MIDI_D1.A 63.63,10.16 P1.2 65.05,13.97 65.05,21.9
  Top 1.778: MIDI_D1.A 64.77,10.16 64.77,27.94 56.67,27.94 POWER.C | BATTERY.1 63.63,3.81 63.63,10.16
  Top 2.54: IC5.3 IC4.3 | 44.45,40.64 arc-90 43.18,41.91 43.18,50.8 44.45,50.8
  Bottom 0.406: v44.45,59.69 44.45,73.66 v49.53,78.74 | U2.8 v25.4,59.69 30.48,59.69 31.75,58.42 v38.1,58.42
  Bottom 1.778: v13.97,93.98 12.06,93.98 9.53,96.52 v9.53,104.14 v9.53,114.3 v9.53,124.46 v9.53,134.62 v9.53,144.78 v9.53,154.94 v9.53,165.1 v9.53,175.26 v9.53,185.42 v9.53,195.58 v9.53,205.74 9.53,210.82 14.61,215.9 54.61,215.9 v55.24,215.26 61.59,208.91 v61.58,205.74 v61.54,195.58 v61.5,185.42 v61.46,175.26 v61.47,165.1 v61.48,154.94 v61.49,144.78 v61.5,134.62 v61.52,124.46 v61.53,114.3 v61.54,104.14 61.59,48.26 64.77,45.09 64.77,40.01 | RST.2 64.97,40.01 64.77,40.01 | RST.1 64.77,33.86 64.77,40.01
LEDOUT  (via drill 0.6)
  Top 0.61: R1.2 22.99,48.13 v22.86,48.26
  Bottom 0.61: v22.86,48.26 17.78,48.26 U2.23
MIDIRX
  Top 0.61: OK1.6 MIDI.C 26.67,35.56 24.13,35.56 24.13,36.96 MR2.2 18.92,36.96 16.51,39.37 16.51,41.91 U2.2
MISO
  Top 0.61: U2.18 13.97,69.85 13.97,78.74 12.7,80.01 ISP1.1
MOSI
  Top 0.61: ISP1.4 7.62,81.28 7.62,78.74 8.89,77.47 8.89,72.39 U2.17
N$1
  pour Top: 15.88,0 7.62,8.26 7.62,74.3 arc31 7.29,75.47 0.36,87.03 arc-31 0,88.33 0,215.9 arc-90 2.54,218.44 68.58,218.44 arc-90 71.12,215.9 71.12,2.54 arc-90 68.58,0
N$2
  Top 0.61: U$3.5 42.04,15.02 MR1.2
N$3
  Top 0.61: MR1.1 MIDI_D.C 36.83,19.05 36.83,20.82 32.25,25.4 26.67,25.4 OK1.2
N$4
  Top 0.61: U$3.4 MIDI_D.A 28.47,19.05 26.67,20.85 OK1.3
N$5
  pour Bottom: 15.88,0 7.62,8.26 7.62,74.23 arc31 7.26,75.53 0.36,87.03 arc-31 0,88.33 0,215.9 arc-90 2.54,218.44 68.58,218.44 arc-90 71.12,215.9 71.12,0
N$6
  Top 0.61: MIDI1.A R1.1
N$7
  Top 0.61: POWER.A 60.17,33.02 R2.2
N$8
  Top 0.61: MIDI.A R4.2
N$9  (via drill 0.6)
  Top 0.61: IC2.9 17.14,80.64 v16.51,80.01 | v36.83,80.01 37.47,80.64 IC1.14
  Bottom 0.61: v16.51,80.01 17.78,80.01 19.05,81.28 30.48,81.28 31.75,80.01 v36.83,80.01
N$12
  Top 0.406: P5.1 Q1.1
  Bottom 0.406: Q1.1 25.4,60.96 24.13,62.23 U2.9
N$13  (via drill 0.6)
  Top 0.61: IC1.9 31.11,80.64 29.21,78.74 29.21,76.2 v30.48,74.93 | v52.07,80.01 51.44,80.64 IC3.14
  Bottom 0.61: v30.48,74.93 43.18,74.93 48.26,80.01 v52.07,80.01
N$14
  Top 0.61: R3.1 25.88,96.87 SOL1.A
N$15
  Top 0.61: SDI1.A 13.32,101.68 S1.8 S1.7 S1.6 S1.5
  Top 1.422: SCON1.2 8.45,100.02 SCAP1.2 12.1,100.46 SDI1.A
N$16
  Top 0.61: SDI2.A 13.24,111.76 14.61,111.76 17.14,111.76 | 17.14,111.76 17.22,111.84 S2.6 S2.5 | 17.14,111.76 S2.7 S2.8
  Top 0.813: 14.61,111.76 15.24,112.39 19.68,112.39 19.68,111.76 14.61,111.76
  Top 1.422: SCON2.2 8.45,110.18 SCAP2.2 12.1,110.62 SDI2.A
N$17
  Top 0.406: P6.1 Q1.2
  Bottom 0.406: Q1.2 25.4,66.04 24.13,64.77 U2.10
N$19
  Top 0.61: R5.1 25.88,107.03 SOL2.A
N$20
  Top 0.61: SDI3.A 13.32,122 S3.8 S3.7 S3.6 S3.5
  Top 1.422: SCON3.2 8.45,120.34 SCAP3.2 12.1,120.78 SDI3.A
N$22
  Top 0.61: R6.1 25.88,117.19 SOL3.A
N$23
  Top 0.61: SDI4.A 13.32,132.16 S4.8 S4.7 S4.6 S4.5
  Top 1.422: SCON4.2 8.45,130.5 SCAP4.2 12.1,130.94 SDI4.A
N$25
  Top 0.61: R7.1 25.88,127.35 SOL4.A
N$26
  Top 0.61: SDI5.A 13.32,142.32 S5.8 S5.7 S5.6 S5.5
  Top 1.422: SCON5.2 8.45,140.66 SCAP5.2 12.1,141.1 SDI5.A
N$28
  Top 0.61: R8.1 25.88,137.51 SOL5.A
N$29
  Top 0.61: SDI6.A 13.32,152.48 S6.8 S6.7 S6.6 S6.5
  Top 1.422: SCON6.2 8.45,150.82 SCAP6.2 12.1,151.26 SDI6.A
N$31
  Top 0.61: R9.1 25.88,147.67 SOL6.A
N$32
  Top 0.61: SDI7.A 13.32,162.64 S7.8 S7.7 S7.6 S7.5
  Top 1.422: SCON7.2 8.45,160.98 SCAP7.2 12.1,161.42 SDI7.A
N$34
  Top 0.61: R10.1 25.88,157.83 SOL7.A
N$35
  Top 0.61: SDI8.A 13.32,172.8 S8.8 S8.7 S8.6 S8.5
  Top 1.422: SCON8.2 8.45,171.14 SCAP8.2 12.1,171.58 SDI8.A
N$37
  Top 0.61: R11.1 25.88,167.99 SOL8.A
N$38
  Top 0.61: SDI9.A 13.32,182.96 S9.8 S9.7 S9.6 S9.5
  Top 1.422: SCON9.2 8.45,181.3 SCAP9.2 12.1,181.74 SDI9.A
N$40
  Top 0.61: R12.1 25.88,178.15 SOL9.A
N$41
  Top 0.61: SDI10.A 13.35,193.12 S10.8 S10.7 S10.6 S10.5
  Top 1.422: SCON10.2 8.45,191.46 SCAP10.2 12.1,191.9 SDI10.A
N$43
  Top 0.61: R13.1 25.88,188.31 SOL10.A
N$44
  Top 0.61: SDI11.A 13.32,203.28 S11.8 S11.7 S11.6 S11.5
  Top 1.422: SCON11.2 8.45,201.62 SCAP11.2 12.1,202.06 SDI11.A
N$46
  Top 0.61: R14.1 25.88,198.47 SOL11.A
N$47
  Top 0.61: SDI12.A 13.32,213.44 S12.8 S12.7 S12.6 S12.5
  Top 1.422: SCON12.2 8.45,211.78 SCAP12.2 12.1,212.22 SDI12.A
N$49
  Top 0.61: R15.1 25.88,208.63 SOL12.A
N$50
  Top 0.61: SDI13.A 57.8,208.2 S13.8 S13.7 S13.6 S13.5
  Top 1.422: SCON13.2 63.06,208.59 SCAP13.2 59.02,209.42 SDI13.A
N$52
  Top 0.61: SOL13.A 45.59,211.17 R16.1
N$53
  Top 0.61: SDI14.A 57.8,198.04 S14.8 S14.7 S14.6 S14.5
  Top 1.422: SCON14.2 63.06,198.43 SCAP14.2 59.02,199.26 SDI14.A
N$55
  Top 0.61: R17.1 45.24,202.85 SOL14.A
N$56
  Top 0.61: SDI15.A 57.8,187.88 S15.8 S15.7 S15.6 S15.5
  Top 1.422: SCON15.2 63.06,188.27 SCAP15.2 59.02,189.1 SDI15.A
N$58
  Top 0.61: R18.1 45.24,192.69 SOL15.A
N$59
  Top 0.61: SDI16.A 57.8,177.72 S16.8 S16.7 S16.6 S16.5
  Top 1.422: SCON16.2 63.06,178.11 SCAP16.2 59.02,178.94 SDI16.A
N$61
  Top 0.61: R19.1 45.24,182.53 SOL16.A
N$62
  Top 0.61: SDI17.A 57.8,167.56 S17.8 S17.7 S17.6 S17.5
  Top 1.422: SCON17.2 63.06,167.95 SCAP17.2 59.02,168.78 SDI17.A
N$64
  Top 0.61: R20.1 45.24,172.37 SOL17.A
N$65
  Top 0.61: SDI18.A 57.8,157.4 S18.8 S18.7 S18.6 S18.5
  Top 1.422: SCON18.2 63.06,157.79 SCAP18.2 59.02,158.62 SDI18.A
N$67
  Top 0.61: R21.1 45.24,162.21 SOL18.A
N$68
  Top 0.61: SDI19.A 57.8,147.24 S19.8 S19.7 S19.6 S19.5
  Top 1.422: SCON19.2 63.06,147.63 SCAP19.2 59.02,148.46 SDI19.A
N$70
  Top 0.61: R22.1 45.24,152.05 SOL19.A
N$71
  Top 0.61: SDI20.A 57.8,137.08 S20.8 S20.7 S20.6 S20.5
  Top 1.422: SCON20.2 63.06,137.47 SCAP20.2 59.02,138.3 SDI20.A
N$73
  Top 0.61: R23.1 45.24,141.89 SOL20.A
N$74
  Top 0.61: SDI21.A 57.8,126.92 S21.8 S21.7 S21.6 S21.5
  Top 1.422: SCON21.2 63.06,127.31 SCAP21.2 59.02,128.14 SDI21.A
N$76
  Top 0.61: R24.1 45.24,131.73 SOL21.A
N$77
  Top 0.61: SDI22.A 57.8,116.76 S22.8 S22.7 S22.6 S22.5
  Top 1.422: SCON22.2 63.06,117.15 SCAP22.2 59.02,117.98 SDI22.A
N$79
  Top 0.61: R25.1 45.24,121.57 SOL22.A
N$80
  Top 0.61: SDI23.A 57.8,106.6 S23.8 S23.7 S23.6 S23.5
  Top 1.422: SCON23.2 63.06,106.99 SCAP23.2 59.02,107.82 SDI23.A
N$82
  Top 0.61: R26.1 45.24,111.41 SOL23.A
N$83
  Top 0.61: SDI24.A 57.8,96.44 S24.8 S24.7 S24.6 S24.5
  Top 1.422: SCON24.2 63.06,96.83 SCAP24.2 59.02,97.66 SDI24.A
N$85
  Top 0.61: R27.1 45.24,101.25 SOL24.A
RCK  (via drill 0.6)
  Top 0.61: U2.6 21.59,57.15 v21.59,73.66 | IC2.12 20.95,79.38 v21.59,78.74 | v34.29,78.74 34.92,79.38 IC1.12 | IC3.12 48.9,81.28 48.26,81.28 45.34,78.74 v43.18,78.74
  Bottom 0.61: v21.59,73.66 v21.59,78.74 v34.29,78.74 v43.18,78.74
RES  (via drill 0.6)
  Top 0.61: U2.1 21.59,41.91 v24.13,39.37 | v54.61,35.56 v54.61,40.64 | v57.15,43.18 58.42,43.18 59.82,41.78 RSTPULLP.1
  Top 1.016: RST.3 67.31,33.58 | 67.31,33.58 EXTERNRST.1 | 67.31,33.58 67.31,36.83 | 67.31,36.83 RSTPULLP.1 59.69,36.83 | RST.4 69.57,36.83 67.31,36.83
  Bottom 0.61: v24.13,39.37 25.4,38.1 31.75,38.1 36.83,33.02 50.8,33.02 52.07,34.29 53.34,34.29 v54.61,35.56 | v54.61,40.64 v57.15,43.18 | U2.1 12.7,48.26 10.16,48.26 8.89,49.53 8.89,77.47 6.35,80.01 6.35,86.36 8.89,88.9 10.16,88.9 ISP1.5
S$1
  Bottom 0.61: U2.13 20.32,72.39 21.59,71.12 E$2.2
S$2
  Bottom 0.61: U2.12 20.32,69.85 21.59,68.58 E$2.1
S$3
  Top 0.813: 56.52,106.68 55.88,106.05 51.44,106.05 51.44,106.68 56.52,106.68
S$4
  Top 0.813: 56.52,116.84 55.88,116.2 51.44,116.2 51.44,116.84 56.52,116.84
S$5
  Top 0.813: 56.52,127 55.88,126.36 51.44,126.36 51.44,127 56.52,127
S$6
  Top 0.813: 56.52,137.16 55.88,136.53 51.44,136.53 51.44,137.16 56.52,137.16
S$7
  Top 0.813: 56.52,147.32 55.88,146.69 51.44,146.69 51.44,147.32 56.52,147.32
S$8
  Top 0.813: 56.52,157.48 55.88,156.84 51.44,156.84 51.44,157.48 56.52,157.48
S$9
  Top 0.813: 56.52,167.64 55.88,167 51.44,167 51.44,167.64 56.52,167.64
S$10
  Top 0.813: 56.52,177.8 55.88,177.16 51.44,177.16 51.44,177.8 56.52,177.8
S$11
  Top 0.813: 56.52,187.96 55.88,187.32 51.44,187.32 51.44,187.96 56.52,187.96
S$12
  Top 0.813: 56.52,198.12 55.88,197.49 51.44,197.49 51.44,198.12 56.52,198.12
S$13
  Top 0.813: 56.52,208.28 55.88,207.65 51.44,207.65 51.44,208.28 56.52,208.28
S$14
  Top 0.813: 14.61,213.36 15.24,214 19.68,214 19.68,213.36 14.61,213.36
S$15
  Top 0.813: 14.61,203.2 15.24,203.84 19.68,203.84 19.68,203.2 14.61,203.2
S$16
  Top 0.813: 14.61,193.04 15.24,193.68 19.68,193.68 19.68,193.04 14.61,193.04
S$17
  Top 0.813: 14.61,182.88 15.24,183.51 19.68,183.51 19.68,182.88 14.61,182.88
S$18
  Top 0.813: 14.61,172.72 15.24,173.35 19.68,173.35 19.68,172.72 14.61,172.72
S$19
  Top 0.813: 14.61,162.56 15.24,163.19 19.68,163.19 19.68,162.56 14.61,162.56
S$20
  Top 0.813: 18.41,153.03 15.24,153.03 14.61,152.4 18.41,152.4 | 18.41,153.03 18.41,152.4 | 18.41,153.03 19.68,153.03 19.68,152.4 18.41,152.4
S$21
  Top 0.813: 14.61,142.24 15.24,142.88 19.68,142.88 19.68,142.24 14.61,142.24
S$22
  Top 0.813: 14.61,132.08 15.24,132.72 19.68,132.72 19.68,132.08 14.61,132.08
S$23
  Top 0.813: 14.61,121.92 15.24,122.56 19.68,122.56 19.68,121.92 14.61,121.92
S$24
  Top 0.813: 14.61,101.6 15.24,102.23 19.68,102.23 19.68,101.6 14.61,101.6
SCK  (via drill 0.6)
  Top 0.61: U2.5 22.86,55.88 v22.86,74.93 19.68,78.11 IC2.11 | v30.48,77.47 33.66,80.64 IC1.11 33.66,83.19 33.02,83.82 v29.21,83.82 | IC3.11 47.62,83.82 v43.18,83.82
  Bottom 0.61: v22.86,74.93 24.13,76.2 29.21,76.2 v30.48,77.47 | v43.18,83.82 v29.21,83.82
SER  (via drill 0.6)
  Top 0.61: v27.94,54.61 27.94,72.39 23.5,76.83 IC2.14
  Bottom 0.61: U2.4 20.32,50.8 26.67,50.8 27.94,52.07 v27.94,54.61
SHIFTOUT0  (via drill 0.6)
  Top 0.61: IC2.15 24.77,83.82 v24.13,84.45 | v16.51,93.34 17.78,94.61 19.68,94.61 S1.4 | S1.4 19.68,96.52 R3.2 22.86,96.52 22.86,96.44 S1.4
  Bottom 0.61: v24.13,84.45 17.14,84.45 15.88,85.72 15.88,90.17 16.51,90.81 v16.51,93.34
SHIFTOUT1  (via drill 0.6)
  Top 0.61: IC2.1 v26.04,89.53 | R5.2 22.65,106.6 S2.4 19.68,104.78 v22.86,104.78
  Bottom 0.61: v26.04,89.53 26.04,101.6 v22.86,104.78
SHIFTOUT2  (via drill 0.6)
  Top 0.61: IC2.2 v24.77,90.81 | R6.2 22.65,116.76 S3.4 19.68,114.94 v19.05,114.3
  Bottom 0.61: v24.77,90.81 24.77,100.97 18.41,107.31 18.41,113.67 v19.05,114.3
SHIFTOUT3  (via drill 0.6)
  Top 0.61: IC2.3 v23.5,89.53 | R7.2 22.65,126.92 S4.4 19.68,125.73 v18.41,124.46
  Bottom 0.61: v23.5,89.53 23.5,100.33 17.14,106.68 17.14,123.19 v18.41,124.46
SHIFTOUT4  (via drill 0.6)
  Top 0.61: IC2.4 v22.23,90.81 | R8.2 22.65,137.08 S5.4 19.68,135.89 v18.41,134.62
  Bottom 0.61: v22.23,90.81 22.23,99.69 15.88,106.05 15.88,132.08 v18.41,134.62
SHIFTOUT5  (via drill 0.6)
  Top 0.61: IC2.5 v20.95,89.53 | R9.2 22.65,147.24 S6.4 19.68,146.05 v18.41,144.78
  Bottom 0.61: v20.95,89.53 20.95,99.06 14.61,105.41 14.61,140.97 v18.41,144.78
SHIFTOUT6  (via drill 0.6)
  Top 0.61: IC2.6 v19.68,90.81 | R10.2 22.65,157.4 S7.4 | v18.41,154.94 19.68,156.21 S7.4 | 19.68,157.48 S7.4
  Bottom 0.61: v19.68,90.81 19.68,98.42 13.34,104.78 13.34,149.86 v18.41,154.94
SHIFTOUT7  (via drill 0.6)
  Top 0.61: IC2.7 v18.41,89.53 | R11.2 22.65,167.56 S8.4 19.68,166.37 v18.41,165.1
  Bottom 0.61: v18.41,89.53 18.41,97.79 12.06,104.14 12.06,158.75 v18.41,165.1
SHIFTOUT8  (via drill 0.6)
  Top 0.61: IC1.15 38.73,83.19 39.37,83.82 41.91,83.82 v41.91,85.09 | R19.2 51.36,182.88 S16.4 v51.44,185.42
  Bottom 0.61: v41.91,85.09 41.91,88.9 41.27,89.53 41.27,175.26 v51.44,185.42
SHIFTOUT9  (via drill 0.6)
  Top 0.61: IC1.1 v40.01,90.81 | R18.2 48.47,193.12 S15.4 v51.44,195.58
  Bottom 0.61: v40.01,90.81 40.01,184.15 v51.44,195.58
SHIFTOUT10  (via drill 0.6)
  Top 0.61: IC1.2 v38.73,89.53 | R17.2 48.47,203.28 S14.4 v51.44,205.74
  Bottom 0.61: v38.73,89.53 38.73,193.04 v51.44,205.74
SHIFTOUT11  (via drill 0.6)
  Top 0.61: IC1.3 v37.47,90.81 | R16.2 51.36,213.36 S13.4 51.44,215.26 44.45,215.26 v41.91,212.72
  Bottom 0.61: v37.47,90.81 37.47,208.28 v41.91,212.72
SHIFTOUT12  (via drill 0.6)
  Top 0.61: IC1.4 v36.2,89.53 | R15.2 19.76,208.28 S12.4 v19.68,205.74
  Bottom 0.61: v36.2,89.53 36.2,189.23 v19.68,205.74
SHIFTOUT13  (via drill 0.6)
  Top 0.61: IC1.5 v34.92,90.81 | R14.2 19.76,198.12 S11.4 v19.68,195.58
  Bottom 0.61: v34.92,90.81 34.92,180.34 v19.68,195.58
SHIFTOUT14  (via drill 0.6)
  Top 0.61: IC1.6 v33.66,89.53 | R13.2 22.65,187.88 S10.4 v19.68,185.42
  Bottom 0.61: v33.66,89.53 33.66,171.45 v19.68,185.42
SHIFTOUT15  (via drill 0.6)
  Top 0.61: IC1.7 v32.38,90.81 | R12.2 22.65,177.72 S9.4 v19.68,175.26
  Bottom 0.61: v32.38,90.81 32.38,162.56 v19.68,175.26
SHIFTOUT16  (via drill 0.6)
  Top 0.61: IC3.15 52.7,84.45 55.24,87 v55.24,89.53 | R20.2 48.47,172.8 S17.4 51.44,174.62 v53.34,174.62
  Bottom 0.61: v55.24,89.53 55.24,97.79 59.69,102.23 59.69,168.28 v53.34,174.62
SHIFTOUT17  (via drill 0.6)
  Top 0.61: IC3.1 v53.98,90.81 | R21.2 51.36,162.56 S18.4 51.44,164.47 v53.34,164.47
  Bottom 0.61: v53.98,90.81 53.98,98.42 58.42,102.87 58.42,159.38 v53.34,164.47
SHIFTOUT18  (via drill 0.6)
  Top 0.61: IC3.2 v52.7,89.53 | R22.2 48.47,152.48 S19.4 51.44,154.31 v53.34,154.31
  Bottom 0.61: v52.7,89.53 52.7,99.06 57.15,103.5 57.15,150.5 v53.34,154.31
SHIFTOUT19  (via drill 0.6)
  Top 0.61: IC3.3 v51.44,90.81 | R23.2 48.47,142.32 S20.4 51.44,144.15 v53.34,144.15
  Bottom 0.61: v51.44,90.81 51.44,99.69 55.88,104.14 55.88,141.6 v53.34,144.15
SHIFTOUT20  (via drill 0.6)
  Top 0.61: IC3.4 v50.16,89.53 | R24.2 48.47,132.16 S21.4 51.44,133.99 v53.34,133.99
  Bottom 0.61: v50.16,89.53 50.16,100.33 54.61,104.78 54.61,132.72 v53.34,133.99
SHIFTOUT21  (via drill 0.6)
  Top 0.61: IC3.5 v48.9,90.81 | R25.2 51.36,121.92 S22.4 51.44,123.83 v52.7,123.83
  Bottom 0.61: v48.9,90.81 48.9,100.97 53.34,105.41 53.34,123.19 v52.7,123.83
SHIFTOUT22  (via drill 0.6)
  Top 0.61: IC3.6 v47.62,89.53 | R26.2 48.47,111.84 S23.4 51.44,113.03 50.8,113.67 43.81,113.67 43.18,113.03 43.18,98.42 44.45,97.16 46.99,97.16 47.62,96.52 v47.62,94.61
  Bottom 0.61: v47.62,89.53 v47.62,94.61
SHIFTOUT23  (via drill 0.6)
  Top 0.61: IC3.7 v46.35,90.81 | S24.4 51.36,101.6 R27.2 | v48.9,103.5 50.8,103.5 51.44,102.87 51.44,101.6 R27.2 | R27.2 48.26,101.6
  Bottom 0.61: v46.35,90.81 46.35,100.97 v48.9,103.5
SPISCK
  Top 0.61: U2.19 15.24,68.58 15.24,81.28 ISP1.3
VCC
  Top 1.778: BATTERY.2 59.69,3.81 59.69,1.27 51.11,1.27 SWITCH.2
VDD  (via drill 0.6)
  Top 0.61: P2.1 48.39,47.12 49.79,48.52 IC4.1
  Top 1.422: 55.62,48.52 64.77,57.67 64.77,90.17 | 64.77,90.17 69.85,95.25 69.85,100.33 | 69.85,100.33 69.85,110.49 | 69.85,110.49 69.85,120.65 | 69.85,120.65 69.85,130.81 | 69.85,130.81 69.85,140.97 | 69.85,140.97 69.85,151.13 | 69.85,151.13 69.85,161.29 | 69.85,161.29 69.85,171.45 | 69.85,171.45 69.85,181.61 | 69.85,181.61 69.85,191.77 | 69.85,191.77 69.85,201.93 | 69.85,201.93 69.85,209.55 SCON13.1 62.36,212.09 SCAP13.1 59.02,212.22 SDI13.C | 69.85,201.93 SCON14.1 62.36,201.93 SCAP14.1 59.02,202.06 SDI14.C | 69.85,191.77 SCON15.1 62.36,191.77 SCAP15.1 59.02,191.9 SDI15.C | 69.85,181.61 SCON16.1 62.36,181.61 SCAP16.1 59.02,181.74 SDI16.C | 69.85,171.45 SCON17.1 62.36,171.45 SCAP17.1 59.02,171.58 SDI17.C | 69.85,161.29 SCON18.1 62.36,161.29 SCAP18.1 59.02,161.42 SDI18.C | 69.85,151.13 SCON19.1 62.36,151.13 SCAP19.1 59.02,151.26 SDI19.C | 69.85,140.97 SCON20.1 62.36,140.97 SCAP20.1 59.02,141.1 SDI20.C | 69.85,130.81 SCON21.1 62.36,130.81 SCAP21.1 59.02,130.94 SDI21.C | 69.85,120.65 SCON22.1 62.36,120.65 SCAP22.1 59.02,120.78 SDI22.C | 69.85,110.49 SCON23.1 62.36,110.49 SCAP23.1 59.02,110.62 SDI23.C | 69.85,100.33 SCON24.1 62.36,100.33 SCAP24.1 59.02,100.46 SDI24.C | 5.08,96.52 10.16,91.44 17.78,91.44 19.05,92.71 62.23,92.71 64.77,90.17 | 5.08,96.52 SCON1.1 1.27,99.06 1.27,106.68 | 1.27,106.68 1.27,116.84 | 1.27,116.84 1.27,127 | 1.27,127 1.27,137.16 | 1.27,137.16 1.27,147.32 | 1.27,147.32 1.27,157.48 | 1.27,157.48 1.27,167.64 | 1.27,167.64 1.27,177.8 | 1.27,177.8 1.27,187.96 | 1.27,187.96 1.27,198.12 | 1.27,198.12 1.27,205.74 SCON12.1 7.75,208.28 SCAP12.1 9.49,208.82 SDI12.C | 1.27,187.96 SCON10.1 7.75,187.96 SCAP10.1 9.49,188.5 SDI10.C
  Top 1.422: 1.27,177.8 SCON9.1 7.75,177.8 SCAP9.1 9.49,178.34 SDI9.C | 1.27,167.64 SCON8.1 7.75,167.64 SCAP8.1 9.49,168.18 SDI8.C | 1.27,157.48 SCON7.1 7.75,157.48 SCAP7.1 9.49,158.02 SDI7.C | 1.27,147.32 SCON6.1 7.75,147.32 SCAP6.1 9.49,147.86 SDI6.C | 1.27,137.16 SCON5.1 7.75,137.16 SCAP5.1 9.49,137.7 SDI5.C | 1.27,127 SCON4.1 7.75,127 SCAP4.1 9.49,127.54 SDI4.C | 1.27,116.84 SCON3.1 7.75,116.84 SCAP3.1 9.49,117.38 SDI3.C | 1.27,106.68 SCON2.1 7.75,106.68 SCAP2.1 9.49,107.22 SDI2.C | 5.08,96.52 7.75,96.52 SCAP1.1 12.1,97.66 SDI1.C | SDI11.C 9.49,198.66 SCAP11.1 7.75,198.12 SCON11.1 1.27,198.12
  Top 1.676: v54.61,10.16 54.61,15.24 v59.69,20.32 | IC4.1 55.62,48.52 arc-90 v55.88,48.26
  Top 1.778: MIDI_D1.C v54.61,10.16
  Bottom 1.676: v59.69,20.32 59.69,44.45 v55.88,48.26
  Bottom 1.778: SWITCH.1 v54.61,10.16 MIDI_D1.C
(copper drawn outside any net)
  shapes: Top area x11

## Text on the board
tPlace: 12 | HOT | 13 | 11 | 14 | 10 | 15 | 9 | 16 | 8 | 17 | 7 | 18 | 6 | 19 | 5 | 20 | 4 | 21 | 3 | 22 | 2 | 23 | 1 | 24 | HOT | ISP | RX | TX | 16MHz | M3 | HOT | 12v | DEBUG | 5V | RESET | MIDI IN | WPI | MIDI-Controlled | POWER | Moduler Instrument | 24-Solenoid Module | RESET | SWITCH | POWER | GND | 48V | SWITCH | MIDI IN